# Altium PCB MasterBoard (SurfaceMount).PcbDoc (part 3 of 3)
Units mil, origin at the board's own origin, x right, y up, seen from the top; angles counter-clockwise.
Board outline 2893 x 3176 mil, 4 copper layers (Top Layer, GROUND, POWER, Bottom Layer), stack 23.756 mil thick; 101 components, 58 nets, 327 pads, 95 vias.
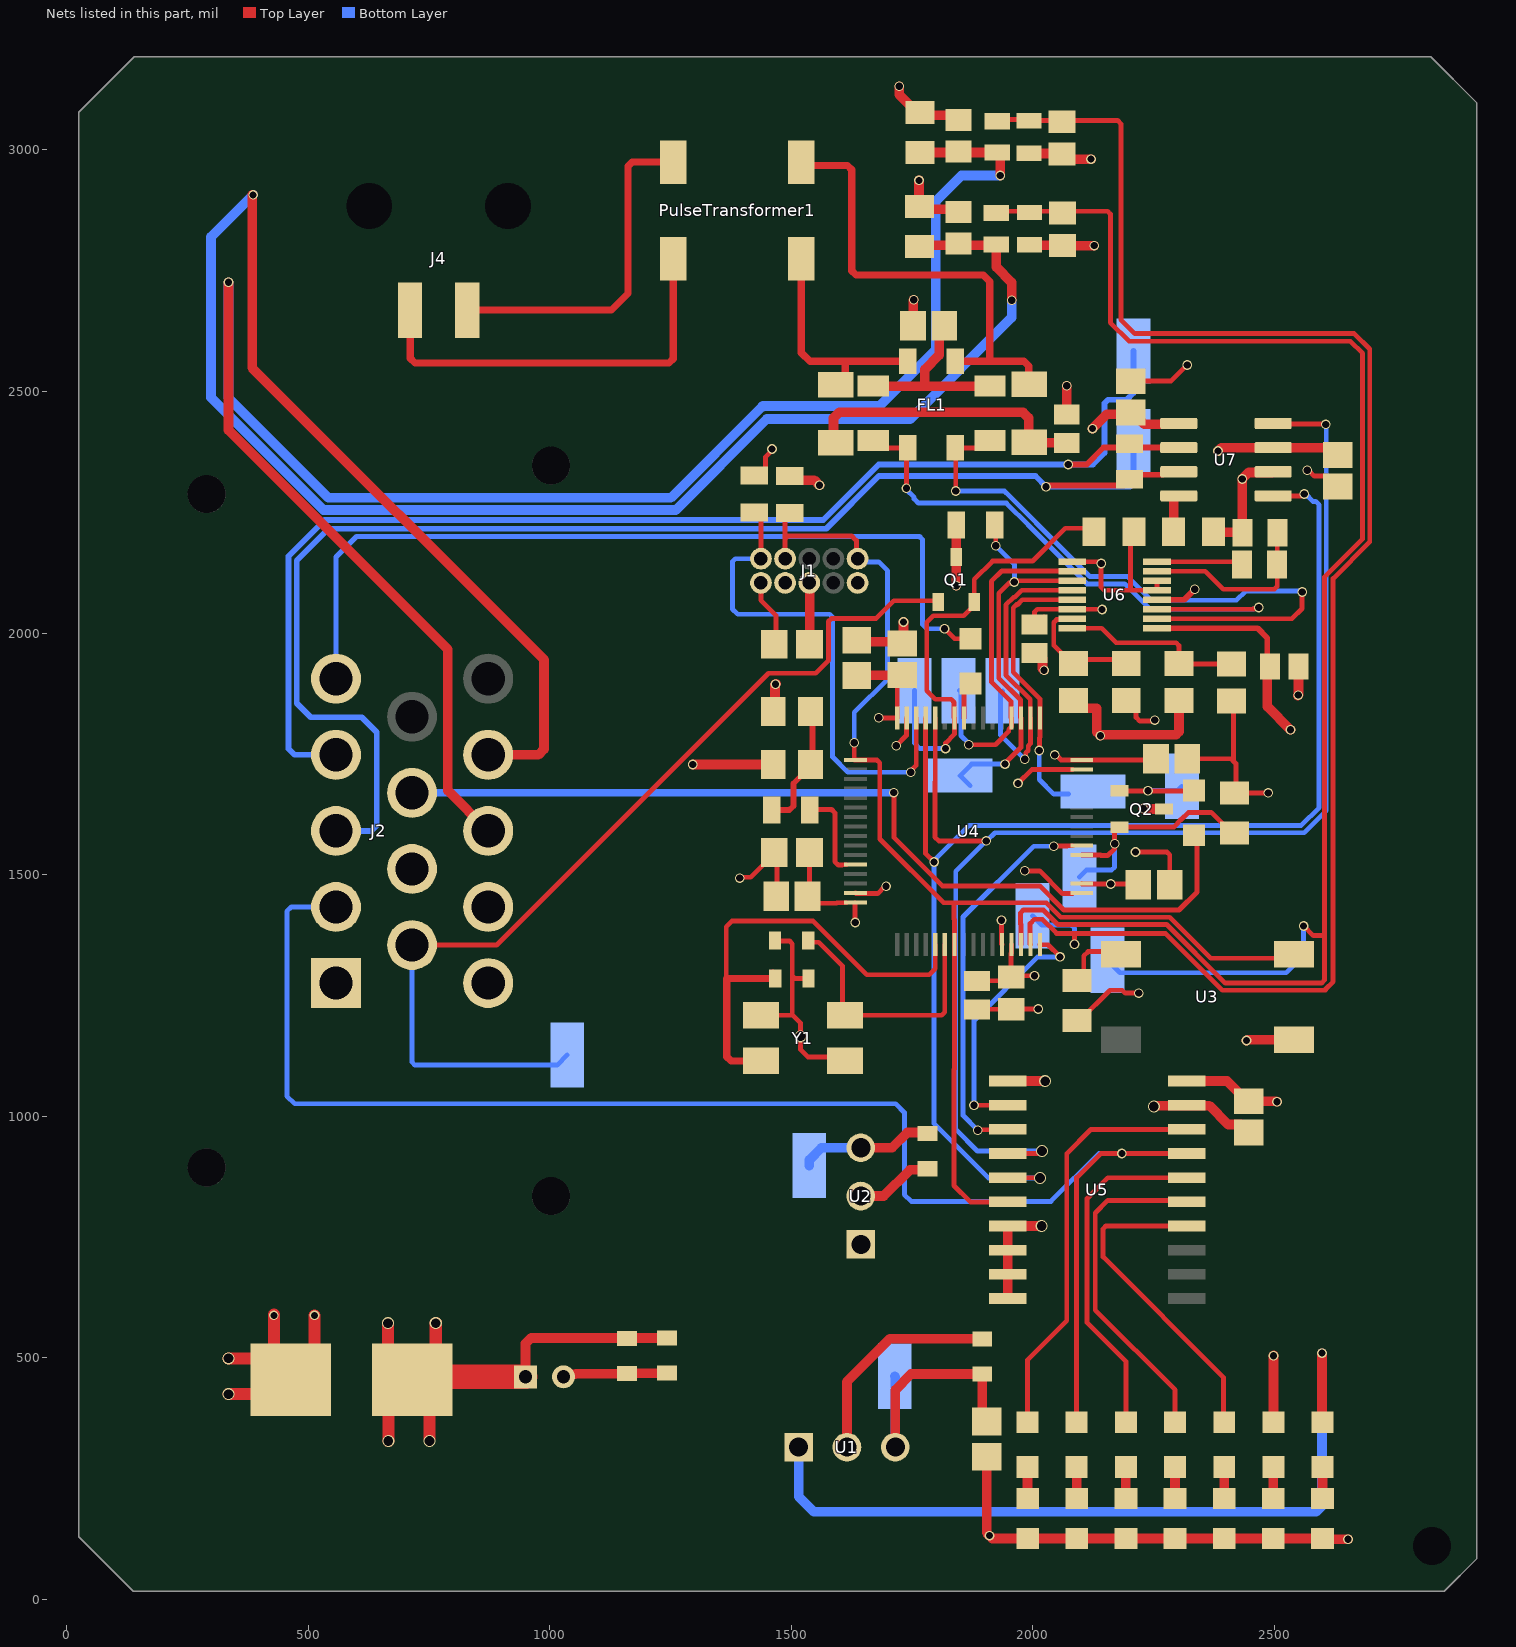
[diagram p4: the nets of this part, all layers, seen from the top]

## Part data (continued)
U6: library part CMP-0937-00011-1, "IsoSPI Isolated Communication Interface, 2.7 to 5.5 V, -40 to 85 degC, 16-Pin MSOP (MS), Pb-Free, Tape and Reel", IO Supply Current="1 uA Max.", IO Supply Voltage Range="1.7 to 5.5 V", Manufacturer="Linear Technology", Power Supply="2.7 to 5.5 V", Receiver Input Resistance="35 kOhm", Supplier Part Number 1=LTC6820IMS#TRPBFCT-ND, Supply Current, IDLE State="2 uA", Temperature Range (degC)="-40 to 85", ComponentLink1Description="Manufacturer URL", ComponentLink1URL=http://www.linear.com/, ComponentLink2Description=Datasheet, ComponentLink2URL=http://cds.linear.com/docs/en/datasheet/6820fa.pdf, ComponentLink3Description="Package Specification", ComponentLink3URL=http://cds.linear.com/docs/en/packaging/05081669_A_MS16.pdf, DatasheetVersion="Rev. A", Manufacturer Part Number=LTC6820IMS#TRPBF, Mounting Technology="Surface Mount", PackageDescription="16-Pin Micro Small Outline Package, Body 4.039 x 3 mm, Pitch 0.5 mm", PackageReference=MS-16, PackageVersion="Rev. A", Packing="Tape and Reel", PartNumber=LTC6820IMS#TRPBF, Supplier 1=Digi-Key, Supplier 2=Mouser, Supplier Part Number 2=584-LTC6820IMS#TRPBF, VBIAS="1.9 to 2.1 V"
U7: "IC CAN TRANSEIVER HS 8SOIC", Case/Package=SOIC, Manufacturer 1="NXP Semiconductors", Manufacturer Part Number 1=TJF1051T/1J, Max Operating Temperature=125°C, Max Supply Voltage=5.5V, Min Operating Temperature=-40°C, Min Supply Voltage=4.5V, Supplier Part Number 1=61AC2368, Category="Interface ICs", ComponentLink1Description=Datasheet, ComponentLink1URL=https://www.farnell.com/datasheets/2080616.pdf, ComponentLink2Description="Supplier Link", ComponentLink2URL=https://www.newark.com/nxp/tjf1051t-1j/can-transceiver-5mbps-soic-8/dp/61AC2368?gclid=CjwKCAiA1eKBBhBZEiwAX3gqlxQsUZSrTqhgUbpvxTd09IiKsEelRDLU8t4m6T0nWWFbevXOORPvhRoC6uIQAvD_BwE&mckv=sitHQX2q7_dc|pcrid|492622077320|plid||kword||match||slid||product|61AC2368|pgrid|108905520170|ptaid|pla-902764019279|&CMP=KNC-GUSA-GEN-Shopping-NewStructure-Manuf-Semiconductors-ICs, ComponentLink3Description=http://www.farnell.com/datasheets/2080616.pdf?src-supplier=Farnell, ComponentLink3URL=http://www.farnell.com/datasheets/2080616.pdf?src-supplier=Farnell, ComponentLink4Description=http://www.nxp.com/documents/data_sheet/TJF1051.pdf?src-supplier=Avnet, ComponentLink4URL=http://www.nxp.com/documents/data_sheet/TJF1051.pdf?src-supplier=Avnet, Data Rate=5Mbps, Mount="Surface Mount", Number of Pins=8, Number of Transceivers=1, Packaging="Tape and Reel", Pricing 1="1=1.29000, 10=1.16000, 25=1.10000, 50=1.00000, 100=0.90400, 250=0.84500 (USD)", Receiver Hysteresis=120mV, RoHS=Yes, RoHS Compliant=Yes, Simplex/Duplex="Half Duplex", Supplier 1=Newark
Y1: library part ABM3B-48.000MHZ-B2-T, "CRYSTAL, 48MHZ, 18PF, 5 X 3.2MM; Product Range:ABM3B Series; Frequency Nom:48MHz; Frequency Stability + / -:50ppm; Frequency Tolerance + / -:20ppm; Crystal Case:SMD, 5mm x 3.2mm; Load Capacitance:18pF; Operating Temperature Min:-20 C", Case/Package=SMD/SMT, ESR (Equivalent Series Resistance)=50R, Frequency=48MHz, Frequency Stability=50ppm, Frequency Tolerance=20ppm, Load Capacitance=18pF, Manufacturer 1=Abracon, Max Operating Temperature=70°C, Min Operating Temperature=-20°C, Operating Frequency="48 MHz", Package=None, Package Quantity=1000, Resistor Type=Ceramic, Supplier Part Number 1=535-9133-1-ND, Availability=Unavailable, Category=Crystals, ComponentLink1Description=https://datasheet.ciiva.com/4945/abm3b-39910-4945264.pdf?src-supplier=Mouser, ComponentLink1URL=https://datasheet.ciiva.com/4945/abm3b-39910-4945264.pdf?src-supplier=Mouser, ComponentLink2Description=https://datasheet.ciiva.com/855/abm3b-855707.pdf?src-supplier=Digi-Key, ComponentLink2URL=https://datasheet.ciiva.com/855/abm3b-855707.pdf?src-supplier=Digi-Key, ComponentLink3Description=https://datasheet.ciiva.com/855/abm3b-855708.pdf?src-supplier=Digi-Key, ComponentLink3URL=https://datasheet.ciiva.com/855/abm3b-855708.pdf?src-supplier=Digi-Key, ComponentLink4Description=https://datasheet.ciiva.com/855/abm3b-855709.pdf?src-supplier=Digi-Key, ComponentLink4URL=https://datasheet.ciiva.com/855/abm3b-855709.pdf?src-supplier=Digi-Key, ComponentLink5Description=https://datasheet.ciiva.com/7998/abm3b-7998585.pdf?src-supplier=Element14, ComponentLink5URL=https://datasheet.ciiva.com/7998/abm3b-7998585.pdf?src-supplier=Element14, Depth=3.2mm, Height=0.043inch, Lead Free="Lead Free", Length=5mm, Manufacturer Part Number 1=ABM3B-48.000MHZ-B2-T, Mount="Surface Mount", MP=ABM3B-48.000MHZ-B2-T, Number of Pins=4, Packaging="Tape and Reel", Price=None, Pricing 1="1=0.95000, 10=0.83900, 50=0.78440, 100=0.69310, 500=0.65664 (USD)", REACH SVHC="No SVHC", RoHS=Yes, Series=ABM3B, Series Resistance=50R, Stock 1=2963, Supplier 1=Digi-Key, Termination=SMD/SMT, Tolerance=20ppm, Width=3.2mm

## Free pads (board coordinates)
  round 60 hole 78.74: 2(2826,111)

## Via types
v1: diameter 20, hole 15, Top Layer to Bottom Layer, 83 vias
v2: diameter 25, hole 20, Top Layer to Bottom Layer, 12 vias

## Nets (pads, with @x,y where several pads share a name; then routed paths per layer and width w, separated by ;. In a path a pad name is that pad's centre, name@x,y a point inside that pad or via, vN(x,y) a via of type N, cw(c..) or ccw(c..) an arc to the next point about the centre after c; other vN are vias at no path point)
12V_Fused: C1.1 C2.1 C4.1 F1.2 R7.2 U1.1 U2.1 | length 2815.8
  Top Layer w10: F1.2@665,505 F1.2@715,455 ; F1.2@666,406 F1.2@715,455 ; F1.2@751,419 F1.2@715,455 ; F1.2@764,504 721,461 F1.2@715,455
  Top Layer w20: C2.1@949.63,461 949.63,529.7 961.35,541.42 C4.1@1243,541.42 ; v1(2598,510) 2598,368.52 R7.2@2599.52,367
  Top Layer w25: F1.2@665,505 v2@665,570 ; v2(666,328) F1.2@666,406 ; v2@751,333 F1.2@751,419 ; F1.2@764,504 v2(764,572)
  Top Layer w50: F1.2@721,461 C2.1@949.63,461
  Bottom Layer w20: U1.1@1515,315.42 1515,213 1546,182 2586.28,182 2598,193.72 v1(2598,510)
  other v2: 751,328 665,572
AIR_Open_Sig: AIR_OPEN_SIGNAL.1 J2.6 Q1.1 | length 2007
  Top Layer w10: J2.6@715,1354.52 890.17,1354.52 1452.6,1916.95 1550.45,1916.95 1576.67,1943.17 1576.67,2024.14 1582.53,2030 1675,2030 1706,2061 1706,2061.14 1711.86,2067 1801.34,2067 Q1.1@1803.6,2064.74
  Bottom Layer w10: J2.6@715,1354.52 715,1111.86 720.86,1106 1015,1106 AIR_OPEN_SIGNAL.1@1036,1127
AIRS_Signal_NMOS: "AIR Signal NMOS.1" Q1.2 R16.2 U4.42 | length 953.1
  Top Layer w10: v1(1819,1761) 1819,1772.35 1837.22,1790.57 U4.42@1837.22,1824.35 1836.55,1825.02 1836.55,1857.07 1830.61,1863.01 1797.85,1863.01 1780,1880.86 1780,2022.14 1793.9,2036.04 1856.59,2036.04 1878.4,2057.85 1878.4,2111.11 1916.29,2149 1999,2149 2067,2217 2113.63,2217 R16.2@2126.63,2204
  Bottom Layer w10: 1755,1881 1755,1772 1766,1761 v1(1819,1761)
CANH: CANH.1 J2.3 R37.2 U7.7 | length 2957.8
  Top Layer w12: v1(2027,2303) 2029.16,2303 2031.46,2305.29 2186.91,2305.29 R37.2@2200,2318.39 2209.52,2327.9 2268.86,2327.9 2274.95,2334 U7.7@2301.72,2334
  Bottom Layer w12: J2.3@557.52,1590.74 630.74,1590.74 642,1602 642,1795 611,1826 505.13,1826 476.26,1854.86 476.26,2150.26 542,2216 1572,2216 1681,2325 2005,2325 v1(2027,2303) 2200.97,2303 2208,2310.03 CANH.1@2208,2396
CANL: CANL.1 J2.4 R37.1 U7.6 | length 2787.4
  Top Layer w12: v1(2073,2349) 2111,2349 2146,2384 2192.39,2384 R37.1@2200,2391.61 2207.61,2384 U7.6@2301.72,2384
  Bottom Layer w12: J2.4@557.52,1748.22 471.78,1748.22 459.26,1760.74 459.26,2159.26 534,2234 1565.96,2234 1680.96,2349 v1(2073,2349) 2124,2349 2148,2373 2148,2475.97 2155.03,2483 2194,2483 2208,2497 CANL.1@2208,2584
CanRx: U4.44 U5.4 U7.4 | length 2888.2
  Top Layer w10: U4.44@1797.85,1824.35 1797.85,1692.52 1797.1,1691.78 1797.1,1577.9 1805,1570 v1(1903,1570) ; U5.4@1948,923 2009.27,923 2014.5,928.23 v2(2018.56,928.23) ; U7.4@2497,2434 2498,2433 2605,2433 v1(2606,2432)
  Bottom Layer w10: v2(2018.56,928.23) 1884.77,928.23 1840.13,972.87 1840.13,1507.13 v1(1903,1570) 1904.36,1570 1921.36,1587 2561.21,1587 2607,1632.79 2607,2431 v1(2606,2432)
CanRx_FromBuff: R3.2 U5.16 | length 720
  Top Layer w10: R3.2@2192.16,367 2192.16,492.84 2112,573 2112,830 2155,873 U5.16@2318,873
CanTx: U4.45 U5.5 U7.1 | length 2754.6
  Top Layer w10: U4.45@1778.17,1824.35 1777.43,1823.62 1777.43,1823.24 1777.43,1544.22 v1(1795.33,1526.33) ; U5.5@1948,873 2014,873 v2(2014.5,872.5) v2@2015,872 ; U7.1@2497,2284 2554.53,2284 2558.53,2288 v1(2561.24,2288)
  Bottom Layer w10: v1(1795.33,1526.33) 1795.33,984.67 1907.5,872.5 v2(2014.5,872.5) ; v1@1797.24,1529.03 1797.24,1530.94 1802,1535.71 1802,1536 1868,1602 2555,1602 2592,1639 2592,2265.64 2584.93,2272.72 2579.23,2272.72 2563.94,2288 v1(2561.24,2288)
CanTx_FromBuff: R4.2 U5.15 | length 702.4
  Top Layer w10: R4.2@2294,367 2294,434 2129,599 2129,800 2155,826 2315,826 U5.15@2318,823
CHANNEL1: C6.1 CHANNEL1.1 R10.1 R11.2 U4.14 | length 3650.6
  Top Layer w10: R11.2@1924,2869.48 1927.52,2873 1990.5,2873 R10.1@1993,2870.5 1995.5,2873 2154.44,2873 2160.3,2867.14 2160.3,2642.7 2199,2604 2657,2604 2682,2579 2682,2195 2603,2116 2603,1374 ; U4.14@1975.02,1355.85 1975.02,1397.1 1974.27,1397.85 1974.27,1421.14 1980.13,1427 2021.57,1427 2051.54,1397.03 2276.76,1397.03 2397.95,1275.84 2597.14,1275.84 2603,1281.7 2603,1374 ; v1(2560,1394) 2580,1374 2603,1374
  Bottom Layer w10: CHANNEL1.1@2154,1323 2180,1297 2524,1297 2560,1333 v1(2560,1394)
CHANNEL2: C11.2 CHANNEL2.1 R13.1 R15.2 U4.15 | length 3447.5
  Top Layer w10: R15.2@1926,3059.48 1929.52,3063 1989.5,3063 R13.1@1992,3060.5 1992.5,3061 C11.2@2060,3061 ; U4.15@1994.7,1355.85 1994.03,1356.52 1994.03,1390.59 1993.95,1390.67 1993.95,1398.95 2003,1408 2019.36,1408 2048.76,1378.6 2086,1378.6 ; C11.2@2060,3058.46 C11.2@2060,3061 ; v1(2086,1356) 2086,1378.6 ; C11.2@2060,3061 2175.14,3061 2182,3054.14 2182,2649 2211,2620 2665,2620 2697,2588 2697,2188.79 2621,2112.79 2621,1278.49 2605.33,1262.81 2605.33,1260.84 2391.73,1260.84 2273.98,1378.6 2086,1378.6
  Bottom Layer w10: CHANNEL2.1@1999,1415 2018,1396 2079,1396 2086,1389 v1(2086,1356)
ChargeSignal: R35.1 U4.41 | length 77.8
  Top Layer w10: U4.41@1856.91,1824.35 1856.91,1880.15 1856.16,1880.9 R35.1@1871,1895.74
Charging: "Charging Signal.1" Q2.1 R33.1 | length 228.3
  Top Layer w10: Q2.1@2178.74,1673.4 2332.14,1673.4 R33.1@2333,1674.26
  Bottom Layer w10: v1(2238,1674) 2299,1674 2308,1683
CS_CHANNEL1: C7.2 J2.13 R9.1 R11.1 | length 4216.6
  Top Layer w20: v1@384,2907 384,2549 988,1945 988,1759.94 976.28,1748.22 J2.13@872.48,1748.22 ; R9.1@1765,2800.63 1766.95,2802.57 1922.05,2802.57 R11.1@1924,2804.52 1924,2757.79 1956,2725.79 v1(1956,2688.87)
  Bottom Layer w20: v1(386,2907) 299,2820 299,2487.64 531.64,2255 1261,2255 1449,2443 1746,2443 1956,2653 v1(1956,2688.87)
CS_CHANNEL2: C10.1 J2.12 R12.1 R15.1 | length 3945.8
  Top Layer w20: v1(335,2726) 335,2420 789,1966 789,1674.22 J2.12@872.48,1590.74 ; R12.1@1766,2994.63 1766.05,2994.57 1925.95,2994.57 R15.1@1926,2994.52 1932,2988.52 v1(1932,2947)
  Bottom Layer w20: v1(335,2726) 335,2487 542,2280 1250.64,2280 1438.64,2468 1439,2468 1441,2470 1682,2470 1799,2587 1799,2894 1852,2947 v1(1932,2947)
GND: C1.2 C2.2 C3.2 C4.2 C5.2 C6.2 C7.1 C8.2 C9.2 C10.2 C11.1 C12.1 C13.1 C14.1 C15.2 C16.1 C17.1 C18.2 C19.1 C20.1 C21.1 C22.1 C23.1 C24.1 C25.1 C26.1 C27.2 C28.2 D1.1 D2.1 D3.1 D4.1 D5.1 D6.1 D7.1 J1.3 J1.5 J1.9 J2.7 J2.11 R9.2 R10.2 R12.2 R13.2 R14.1 R16.1 R20.2 R23.2 R25.2 R26.1 R34.1 R36.2 U1.2 U2.2 U3.4 U4.12 U4.18 U4.31 U4.47 U4.63 U5.1 U5.7 U5.8 U5.9 U5.10 U5.19 U6.1 U6.13 U6.14 U7.2 Y1.2 Y1.4 | length 6349.1
  Top Layer w10: v1(1393,1493) 1394.91,1494.91 1415.46,1494.91 1464.53,1543.98 C15.2@1464.53,1546 1470,1540.53 1470,1456.48 C14.1@1468.52,1455 ; Y1.4@1437.39,1209.24 1502.76,1209.24 ; C28.2@1466.93,1362.93 1496.07,1362.93 1501.93,1357.07 1501.93,1290.93 ; C27.2@1535.38,1284.93 1507.93,1284.93 1501.93,1290.93 ; Y1.2@1612.86,1117 Y1.2@1610.61,1114.76 1602.37,1123 1534,1123 1519,1138 v2(1519,1165.5) 1519,1193 1502.76,1209.24 ; U4.63@1632.5,1462.15 1633.17,1461.48 1669.62,1461.48 1670.06,1461.05 1678.34,1461.05 1693.29,1476 v1(1696,1476) ; v1(1717,1767) 1738.13,1788.13 1738.13,1823.69 U4.47@1738.8,1824.35 ; C16.1@1884,1221.47 1954.94,1221.47 C17.1@1955,1221.54 1955.46,1222 v1(2011,1222) ; v1(1934.9,1405.9) 1934.9,1380.9 1934.98,1380.82 1934.98,1356.52 U4.12@1935.65,1355.85 ; v1(1969,1689) 1998.06,1718.06 U4.31@2082.38,1718.06 ; v1(1983,1508) 2014,1508 2060.95,1461.05 2070.95,1461.05 2071.39,1461.48 U4.18@2082.38,1461.48 ; U6.1@2081.4,2147.9 2134.4,2147.9 2138.29,2144 v1(2141,2144) 2141,2095 2147.16,2088.84 2201.88,2088.84 ; R23.2@2193,1860.57 2213.28,1840.29 2213.28,1825.72 2220.91,1818.09 2250.09,1818.09 v1(2252,1820) ; C24.1@2202,2521.48 2285.48,2521.48 v1(2319,2555) ; R16.1@2209.37,2210 2201.88,2202.51 2201.88,2088.84 ; v1(2212,1547) 2277.1,1547 2282.96,1541.14 C12.1@2282.96,1479 ; U6.14@2256.6,2108.53 U6.13@2256.6,2088.84 2201.88,2088.84 ; C13.1@2324.48,1745 C13.1@2319.48,1740 2410,1740 2415,1735 ; R25.2@2411,1859.57 2415,1855.57 2415,1735 ; v1@2487,1669 v1(2486.63,1669.37) R34.1@2417,1669.37 2420,1672.37 2420,1730 2415,1735 ; v1(2567.71,2337) 2570.41,2337 2582.32,2325.09 2609.43,2325.09 C23.1@2631,2303.52 ; 1501.93,1290.93 1501.93,1210.07 1502.76,1209.24
  Top Layer w20: C2.2@1028.37,461 1033.64,466.27 1052.56,466.27 1053.87,467.58 C1.2@1160,467.58 1160.5,468.08 1242.5,468.08 C4.2@1243,468.58 ; v1(1296,1728) R20.2@1462.57,1728 R20.2@1466.57,1728 ; R14.1@1502.37,2330.76 R14.1@1497,2325.39 1505.7,2316.68 1547.32,2316.68 v1(1558,2306) ; J1.5@1537,2104 1538,2103 1538,1978 C8.2@1539,1977 ; U1.2@1615,315.42 1615,451 1703.42,539.42 C3.2@1895,539.42 ; C18.2@1635,1985.47 1638.49,1981.97 1715.45,1981.97 1720.48,1987 C19.1@1729,1978.48 ; U2.2@1643.58,835 1691,835 1745.37,889.37 1779.79,889.37 C5.2@1782,891.58 ; v1(1723,3132) 1723,3114.43 1746.31,3091.12 1784.12,3091.12 1770.37,3077.37 R12.2@1766,3077.37 ; C19.1@1729,1987 1732,1990 v1(1732,2023) ; C26.1@1751.52,2636 1752,2636.48 1752,2689 v1(1753,2690) ; v1(1764,2937) 1764,2884.37 R9.2@1765,2883.37 ; R9.2@1771.89,2890.27 1784.69,2877.47 1840.1,2877.47 C7.1@1846,2871.57 ; R12.2@1784.69,3090.47 1784.69,3073.03 1785.69,3072.03 1835.54,3072.03 C10.2@1846,3061.57 ; C9.2@1904,295.55 1904,138.12 1915.72,126.4 D1.1@1989,126.4 D2.1@2090.67,126.4 D3.1@2192.33,126.4 D4.1@2294,126.4 D5.1@2395.67,126.4 D6.1@2497.33,126.4 D7.1@2599,126.4 2600.4,125 v1(2652,125) ; U5.10@1948,623 U5.9@1948,673 U5.8@1948,723 U5.7@1948,773 v2(2018,773) ; U5.1@1948,1073 U5.1@1948,1073 2025.19,1072.96 v2(2025.22,1072.92) ; R13.2@1992,2993.5 1992.98,2992.52 C11.1@2059.02,2992.52 ; R10.2@1993,2803.5 1993.48,2803.02 2060.52,2803.02 2061.54,2802 v1(2127,2802) ; C22.1@2003,1958.47 2008.91,1958.47 2019.57,1947.8 2019.57,1926.43 v1(2023,1923) ; C11.1@2060,2991.54 C11.1@2059.02,2992.52 ; C25.1@2070,2452.53 v1(2070,2512) ; v1(2120,2981) 2070.54,2981 C11.1@2059.02,2992.52 ; v2(2250,1020.5) 2251.35,1020.5 2252.85,1022 U5.19@2318,1022 ; U5.19@2318,1023 2319,1022 2365,1022 2403.98,983.02 2430.5,983.02 C20.1@2447,966.52 ; R36.2@2373.7,2210 2374.7,2209 2432.58,2209 R26.1@2433,2208.58 ; R26.1@2433.58,2208 R26.1@2433,2208.58 ; v1(2442,1157) 2443.42,1158.42 U3.4@2540.13,1158.42 U3.4@2557,1141.55 ; U7.2@2497,2334 2495.39,2332.39 2446.39,2332.39 v1(2433,2319) R26.1@2433,2208.58 ; v1@2548,1871 v1(2548.76,1871.76) 2549.53,1872.53 C21.1@2549.53,1931
  other v1: 1909.86,132.26
HEARTBEAT: R1.2 U5.18 | length 858.5
  Top Layer w10: R1.2@1988.48,367 1988.48,495.48 2070,577 2070,923 2120,973 U5.18@2318,973
HEARTBEAT_BUFF: U4.16 U5.2 | length 532.8
  Top Layer w10: v1@1876.77,1024.23 v1(1878,1023) U5.2@1948,1023 U5.2@1948.23,1023.23 ; U4.16@2014.39,1355.85 2014.39,1355 2031,1355 v1(2056,1330)
  Bottom Layer w10: v1(1878,1023) 1878,1198.35 2009.13,1329.48 2055.48,1329.48 v1(2056,1330)
IM: FL1.2 R31.1 U6.10 | length 1330.6
  Top Layer w10: v1(1840,2294) 1840,2382.65 FL1.2@1839.21,2383.43 1895.54,2383.43 R31.1@1911,2398.9 ; U6.10@2256.6,2029.79 2535.79,2029.79 2557,2051 v1(2557,2085)
  Bottom Layer w10: v1(1840,2294) 1941,2294 1951,2284 1951.21,2284 2006,2229.21 2006,2229 2118,2117 2196.21,2117 2245.09,2068.13 2344.1,2068.13 2344.23,2068 2421,2068 2440,2087 2547.93,2087 2548.02,2086.91 2555.09,2086.91 v1(2557,2085)
IM_Out_Connector: J4.2 PulseTransformer1.3 | length 707.5
  Top Layer w15: J4.2@829.06,2668.65 1127.65,2668.65 1162,2703 1162,2966.21 1170.79,2975 PulseTransformer1.3@1255.5,2975
IP: FL1.1 R29.2 U6.11 | length 1212
  Top Layer w10: R29.2@1669.54,2398.9 1685.01,2383.43 FL1.1@1740.79,2383.43 1738,2380.65 v1(1738,2300) ; U6.11@2256.6,2049.47 2456.4,2049.47 2458.02,2051.09 2465.09,2051.09 v1(2467,2053)
  Bottom Layer w10: v1(1738,2300) 1738,2297.29 1754.06,2281.24 1754.06,2277.94 1763,2269 1945,2269 1991,2223 1991,2222.79 2111.79,2102 2190,2102 2242.53,2049.47 2456.4,2049.47 2458.02,2051.09 2465.09,2051.09 v1(2467,2053)
IP_Out_Connector: J4.1 PulseTransformer1.4 | length 859.2
  Top Layer w15: J4.1@710.94,2668.65 710.94,2569.06 721,2559 1246.71,2559 1255.5,2567.79 PulseTransformer1.4@1255.5,2775
MISO: R27.1 TP_MISO.1 U4.35 U6.3 | length 816.3
  Top Layer w10: R27.1@1920.37,2224 1923,2221.37 v1(1923,2181) ; v1(1942,1729) 1942,1730.35 1975.02,1763.36 U4.35@1975.02,1824.35 1974.35,1825.02 1974.35,1861.65 1929,1907 1929,2082.64 1950.44,2104.08 1959.51,2104.08 v1(1961.42,2106) ; v1@1961.51,2107.91 1966.04,2107.91 1966.66,2108.53 U6.3@2081.4,2108.53
  Bottom Layer w10: TP_MISO.1@1870,1684 TP_MISO.1@1849,1705 1873,1729 v1(1942,1729) ; v1(1923,2181) 1961.42,2142.58 v1(1961.42,2106)
NetC25_2: C25.2 R30.1 R32.2 | length 596.5
  Top Layer w20: R30.1@1592,2393.92 1587,2398.92 1587,2445.28 1598.72,2457 1979.28,2457 1991,2445.28 1991,2395.92 R32.2@1992,2394.92 1992.72,2394.2 2069.28,2394.2 C25.2@2070,2393.47
NetC26_2: C26.2 R29.1 R31.2 | length 383.1
  Top Layer w20: R29.1@1669.54,2511.1 1776.1,2511.1 ; C26.2@1816.48,2636 1805.91,2625.43 1805.91,2575.49 1776.1,2545.69 1776.1,2511.1 ; R31.2@1911,2511.1 1776.1,2511.1
"NetCharging Signal NMOS_1": "Charging Signal NMOS.1" Q2.2 R34.2 U4.22 | length 524
  Top Layer w10: U4.22@2101,1540.89 2139.82,1540.89 2140.92,1539.79 2154.79,1539.79 2169,1554 v1(2169,1564) 2169,1592.74 2174.86,1598.6 2291.49,1598.6 2300.36,1607.47 2300.36,1608.52 2306.22,1614.38 2307.27,1614.38 2321.89,1629 2368.69,1629 2411.06,1586.63 R34.2@2417,1586.63
  Bottom Layer w10: 2096,1495 2111,1510 2163.14,1510 2169,1515.86 v1(2169,1564)
NetD1_2: D1.2 R1.1 | length 65.6
  Top Layer w20: R1.1@1988.48,274.48 1988.74,274.22 1988.74,209.34 D1.2@1989,209.08
NetD2_2: D2.2 R2.1 | length 65.5
  Top Layer w20: R2.1@2090.32,274.48 2090.49,274.31 2090.49,209.25 D2.2@2090.67,209.08
NetD3_2: D3.2 R3.1 | length 65.5
  Top Layer w20: R3.1@2192.16,274.48 2192.25,274.39 2192.25,209.16 D3.2@2192.33,209.08
NetD4_2: D4.2 R4.1 | length 65.4
  Top Layer w20: D4.2@2294,209.08 R4.1@2294,274.48
NetD5_2: D5.2 R5.1 | length 65.5
  Top Layer w20: D5.2@2395.67,209.08 2395.75,209.16 2395.75,274.39 R5.1@2395.84,274.48
NetD6_2: D6.2 R6.1 | length 65.5
  Top Layer w20: D6.2@2497.33,209.08 2497.51,209.25 2497.51,274.31 R6.1@2497.68,274.48
NetD7_2: D7.2 R7.1 | length 65.6
  Top Layer w20: D7.2@2599,209.08 2599.26,209.34 2599.26,274.22 R7.1@2599.52,274.48
NetF1_1: F1.1 J2.1 | length 625.9
  Top Layer w10: F1.1@513,503.79 F1.1@464.21,455 ; F1.1@464.21,455 441,455 399,413 422.21,413 F1.1@464.21,455
  Top Layer w25: v2(335,425) 393.25,425 399,419.25 F1.1@399,413 ; v2(335,499) F1.1@420.21,499 ; v1@429,590 429,490.21 F1.1@464.21,455 ; F1.1@513,503.79 v1(513,588)
  other v1: 429,588
NetFL1_3: FL1.3 PulseTransformer1.2 R32.1 | length 974.1
  Top Layer w10: R32.1@1991,2516.08 R32.1@1992,2515.08
  Top Layer w15: PulseTransformer1.2@1520.5,2975 1527.5,2968 1616.21,2968 1625,2959.21 1625,2749.79 1633.79,2741 1897,2741 1910.32,2727.68 1910.32,2562.57 ; FL1.3@1839.21,2562.57 1910.32,2562.57 ; R32.1@1991,2516.08 1991,2553 1981.43,2562.57 1910.32,2562.57
NetFL1_4: FL1.4 PulseTransformer1.1 R30.2 | length 478.9
  Top Layer w10: R30.2@1592,2514.08 R30.2@1594.92,2517
  Top Layer w15: PulseTransformer1.1@1520.5,2775 1520.5,2580.5 1538.43,2562.57 1611.49,2562.57 ; R30.2@1594.92,2517 1595.21,2517 1611.49,2533.28 1611.49,2562.57 ; FL1.4@1740.79,2562.57 1611.49,2562.57
NetJ2_5: J2.5 R35.2 | length 1779.4
  Top Layer w10: v1(1817,2009) 1837.74,1988.26 R35.2@1871,1988.26 R35.2@1875,1992.26
  Bottom Layer w10: J2.5@557.52,1905.7 557.52,2157.52 600,2200 1765.14,2200 1771,2194.14 1771,2018 1780,2009 v1(1817,2009)
NetJ2_8: J2.8 R33.2 | length 1914.9
  Top Layer w10: v1(1712,1670) 1712,1577.3 1812.35,1476.95 2014.05,1476.95 2063.97,1427.03 2302.22,1427.03 2339.36,1464.17 2339.36,1575.38 R33.2@2333,1581.74
  Bottom Layer w15: J2.8@715,1669.48 v1@1712,1669.48
NetR17_1: R17.1 U3.1 | length 139.3
  Top Layer w10: R17.1@2091,1281.37 2105,1295.37 2105,1332 2114,1341 2176.45,1341 U3.1@2181.87,1335.58
NetR18_1: R18.1 U4.60 | length 182.8
  Top Layer w10: R18.1@1538.37,1634 1539.37,1635 1582.97,1635 1590,1627.97 1590,1527.13 1597.03,1520.1 1605.31,1520.1 1605.75,1520.54 U4.60@1613.87,1520.54
NetR18_2: R18.2 R19.1 R20.1 | length 260.1
  Top Layer w12: R18.2@1459.63,1634 1495.74,1634 1504.23,1642.49 1504.23,1688.82 R20.1@1543.41,1728 ; R19.1@1543,1838 1543.43,1837.57 R20.1@1543.43,1728
NetR21_1: R21.1 R26.2 U6.15 | length 378.2
  Top Layer w10: U6.15@2256.6,2128.21 2356.39,2128.21 2393.6,2091 2499.56,2091 2505.42,2096.86 2505.42,2207 R26.2@2506.42,2208
NetR21_2: R21.2 U6.16 | length 178.4
  Top Layer w10: U6.16@2256.6,2147.9 2426.69,2147.9 R21.2@2432.58,2142
NetR22_1: R22.1 R23.1 U6.7 | length 261.4
  Top Layer w10: U6.7@2081.4,2029.79 2079.51,2027.9 2048.72,2027.9 2042.86,2022.04 2042.86,1974.59 2080.02,1937.43 R22.1@2084,1937.43 2092,1945.43 2185,1945.43 R23.1@2193,1937.43
NetR24_1: R24.1 R25.1 U6.8 | length 381.6
  Top Layer w10: U6.8@2081.4,2010.1 2141.9,2010.1 2172,1980 2296.14,1980 2302,1974.14 R24.1@2302,1937.43 2303,1936.43 R25.1@2411,1936.43
NetR36_1: R36.1 U7.8 | length 83.8
  Top Layer w20: R36.1@2290.96,2210 2290.96,2282.39 2292.57,2284 U7.8@2301.72,2284
NetTP_CS_1: TP_CS.1 U4.33 U6.5 | length 581.5
  Top Layer w10: v1(2013,1757) 2013.32,1757.32 2013.32,1783.48 2014.39,1784.54 2014.39,1864.04 1959,1919.43 1959,2052.14 1966.07,2059.21 1968.13,2059.21 1978.08,2069.16 U6.5@2081.4,2069.16
  Bottom Layer w10: v1(2013,1757) 2013,1697.04 2043.04,1667 TP_CS.1@2074,1667
NetTP_MOSI_1: TP_MOSI.1 U4.36 U6.2 | length 720.7
  Top Layer w10: v1(1867,1769) 1922.39,1769 1949.98,1796.59 1949.98,1801.05 1955.33,1806.4 U4.36@1955.33,1824.35 1954.66,1825.02 1954.66,1858.34 1914,1899 1914,2106.99 1935.88,2128.87 2080.74,2128.87 U6.2@2081.4,2128.21
  Bottom Layer w10: TP_MOSI.1@1848,1881 1851,1878 1851,1787.71 1867,1771.71 v1(1867,1769)
NetTP_SCK_1: TP_SCK.1 U4.34 U6.4 | length 659
  Top Layer w10: v1@1982,1739 1984.91,1741.91 1984.91,1752.05 1990.02,1757.15 1990.02,1766.36 1994.7,1771.05 U4.34@1994.7,1824.35 1994.24,1824.82 1994.24,1862.98 1944,1913.21 1944,2058.36 1959.86,2074.21 1961.92,2074.21 1976.55,2088.84 U6.4@2081.4,2088.84
  Bottom Layer w10: TP_SCK.1@1937,1880 1933,1876 1933,1789 v1(1983,1739)
OSC_IN: C27.1 U4.5 Y1.1 | length 1038.7
  Top Layer w10: 1369,1285.21 1365,1289.21 1365,1392 1377,1404 1545,1404 1656,1293 1785,1293 1797.85,1305.85 U4.5@1797.85,1355.85
  Top Layer w15: 1369,1285.21 1409.73,1285.21 ; Y1.1@1437.39,1114.76 1374.79,1114.76 1366,1123.54 1366,1285 1409.73,1285 1466.41,1285 C27.1@1466.48,1284.93 1466.48,1290.83 C27.1@1461.18,1296.13
OSC_OUT: C28.1 U4.6 Y1.3 | length 546.4
  Top Layer w10: C28.1@1534.83,1363.93 1538.52,1360.24 1556.76,1360.24 1606,1311 1606,1213.86 Y1.3@1610.61,1209.24 1810.93,1209.24 1817.54,1215.85 U4.6@1817.54,1355.85
RESET: J1.4 J1.10 R14.2 U3.2 U4.7 U4.49 U5.6 | length 2670.5
  Top Layer w10: J1.4@1487,2154 1487,2195.14 ; R14.2@1497,2248.61 1487,2238.61 1487,2195.14 ; v1(1630,1773) 1630,1738.41 1630.67,1737.74 U4.49@1632.5,1737.74 1632.93,1737.31 1677.14,1737.31 1683,1731.45 1683,1574 1815,1442 1836.47,1442 ; J1.10@1637,2154 1634.5,2156.5 1634.5,2191.5 1625,2201 1492.86,2201 1487,2195.14 ; U5.6@1948,823 1870,823 1836.47,856.53 1836.47,1096.84 1837.22,1097.59 1837.22,1407.53 1836.47,1408.28 1836.47,1442 ; U3.2@2540.13,1335.58 2531.55,1327 2368,1327 2282.97,1412.03 2057.76,1412.03 2027.79,1442 1836.47,1442
  Bottom Layer w10: v1(1630,1773) 1630,1836 1699,1905 1699,2129 1680.5,2147.5 1643.5,2147.5 J1.10@1637,2154
RESET_FromBuff: R5.2 U5.14 | length 679.5
  Top Layer w10: U5.14@2318,773 2150.86,773 2145,767.14 2145,709.14 2394,460.14 2394,368.84 R5.2@2395.84,367
SHUTDOWN: J2.2 R2.2 U5.17 | length 3200.7
  Top Layer w10: R2.2@2090.32,367 2090.32,873.11 2140.21,923 v1(2184,923) U5.17@2318,923
  Bottom Layer w10: J2.2@557.52,1433.26 465.26,1433.26 456,1424 456,1042 472,1026 1716,1026 1734,1008 1734,838 1748,824 2037,824 2136,923 v1(2184,923)
SHUTDOWN_BUFF: U4.23 U5.3 | length 805.2
  Top Layer w10: v1(1885.77,971.23) 1886.65,972.12 1947.12,972.12 U5.3@1948,973 ; v1(2043,1559) 2043.24,1559.24 2071,1559.24 2071.67,1559.91 U4.23@2082.38,1559.91
  Bottom Layer w10: v1(1885.77,971.23) 1855.13,1001.87 1855.13,1412.47 2001.65,1559 v1(2043,1559)
SWDIO: J1.2 R8.1 U4.46 | length 1060.3
  Top Layer w10: R8.1@1423,2249.61 R8.1@1432.65,2249.61 ; J1.2@1437,2154 R8.1@1437,2249.61 ; v1(1747,1712) 1747,1714.71 1758.48,1726.19 U4.46@1758.48,1824.35
  Bottom Layer w10: J1.2@1437,2154 1383.86,2154 1378,2148.14 1378,2050 1389,2039 1579.14,2039 1585,2033.14 1585,1744 1617,1712 v1(1747,1712)
VCC_3.3V: C5.1 C8.1 C12.2 C13.2 C14.2 C15.1 C16.2 C17.2 C18.1 C19.2 C22.2 C24.2 J1.1 Q1.3 Q2.3 R8.2 R17.2 R19.2 R27.2 U2.3 U4.13 U4.19 U4.32 U4.48 U4.64 U6.6 U7.5 VCC_3.3V.1 | length 2259.3
  Top Layer w10: R8.2@1423,2326.39 1432.84,2326.39 1446.54,2340.09 1446.54,2364.84 1460,2378.29 v1(1460,2381) ; J1.1@1437,2104 1437,2068 1468,2037 1468,1980.47 C8.1@1464.53,1977 ; C15.1@1537.47,1546 1537.47,1458.99 C14.2@1533.48,1455 1547.35,1441.13 1593.13,1441.13 1593.87,1441.87 U4.64@1613.87,1441.87 ; U4.64@1631.75,1441.8 1631.75,1401.25 v1(1632,1401) ; v1(1680.93,1825.13) 1681.7,1824.35 U4.48@1719.11,1824.35 1719.11,1902.13 1718.36,1902.88 1728.51,1913.03 C19.2@1729,1913.52 ; C16.2@1884,1280.53 1947.06,1280.53 C17.2@1957.54,1291 ; U4.13@1955.33,1355.85 1955.33,1337.9 1954.58,1337.15 1954.58,1293.95 C17.2@1957.54,1291 ; v1(2003,1291) C17.2@1957.54,1291 ; C22.2@2022.84,2033.2 2007.17,2017.53 C22.2@2003,2017.53 2003,2043.61 2008.86,2049.47 U6.6@2081.4,2049.47 2142.53,2049.47 v1(2143,2049) ; v1(2045,1748) 2047.71,1748 2057.97,1737.74 2252.26,1737.74 C13.2@2254.52,1740 ; R17.2@2091,1198.63 2096.94,1198.63 2159.31,1261 2184.8,1261 2190.8,1255 v1(2219,1255) ; U4.19@2101,1481.83 2101.67,1481.17 2135.3,1481.17 2135.73,1480.73 2216.27,1480.73 C12.2@2218,1479
  Top Layer w20: R19.2@1466.14,1838 1466.14,1893.14 v1@1468,1895 ; C18.1@1635,1912.53 1635.49,1913.03 C19.2@1728.51,1913.03 ; U2.3@1643.58,935 1708.57,935 1739.99,966.42 1780,966.42 C5.1@1782,964.42 ; C19.2@1718.36,1902.88 C19.2@1729,1913.52 ; v1(1841,2098) Q1.3@1841,2157.26 1841.32,2157.57 1841.32,2223.69 R27.2@1841.63,2224 ; v1(2123.27,2423.27) 2153.2,2453.2 2198.68,2453.2 C24.2@2202,2456.52 ; C24.2@2205.94,2456.52 2230.07,2432.39 U7.5@2301.72,2432.39 ; v1(2228,1637) 2229,1636 Q2.3@2271.26,1636
  Bottom Layer w20: VCC_3.3V.1@1537,898 1537,909.96 1562.04,935 U2.3@1643.58,935
  other v1: 2160.73,1480.73 1467.07,1894.07
VCC_5V: C3.1 C9.1 C20.2 C21.2 C23.2 J2.10 R6.2 R22.2 R24.2 U1.3 U5.20 U6.9 U6.12 U7.3 VCC_5V.1 | length 2048.2
  Top Layer w12: U6.9@2256.6,2010.1 2464.9,2010.1 2485,1990 C21.2@2485,1925.53 ; U6.12@2256.6,2069.16 2312.78,2069.16 v1(2334.62,2091)
  Top Layer w20: U1.3@1715,315.42 1715,434 1747.58,466.58 C3.1@1895,466.58 1895,377.45 C9.1@1904,368.45 ; R22.2@2084,1860.57 2099.71,1844.86 2132.1,1844.86 2132.1,1794.95 v1(2139.52,1787.52) 2142,1790 2295.98,1790 2302,1796.02 R24.2@2302,1860.57 ; U5.20@2318,1073 2401.54,1073 2443.06,1031.48 C20.2@2447,1031.48 2503.52,1031.48 v1(2505,1030) ; v1(2383,2377) 2390,2384 U7.3@2497,2384 2615.48,2384 C23.2@2631,2368.48 ; C21.2@2490.47,1931 2485,1925.53 2485,1848 v1(2533,1800) ; R6.2@2497.68,367 v1(2497.68,504.68) v1@2498,505
  Bottom Layer w20: VCC_5V.1@1714,462 1715,461 U1.3@1715,315.42
pads on no net: J1.6 J1.7 J1.8 J2. J2.9 J2.14 J4. U3.3 U4.1 U4.2 U4.3 U4.4 U4.8 U4.9 U4.10 U4.11 U4.17 U4.20 U4.21 U4.24 U4.25 U4.26 U4.27 U4.28 U4.29 U4.30 U4.37 U4.38 U4.39 U4.40 U4.43 U4.50 U4.51 U4.52 U4.53 U4.54 U4.55 U4.56 U4.57 U4.58 U4.59 U4.61 U4.62 U5.11 U5.12 U5.13

## Polygon pours and split planes (outlines as drawn)
GND on GROUND (split plane): 2897.9,3089.68 2897.9,92.32 2842.68,37.1 146.32,37.1 45.1,138.32 45.1,3069.68 148.32,3172.9 2814.68,3172.9
VCC_5V on POWER (split plane): 2897.9,3089.68 2897.9,92.32 2842.68,37.1 146.32,37.1 45.1,138.32 45.1,3069.68 148.32,3172.9 2814.68,3172.9
NetF1_1 on POWER (split plane): 664.9,1303.89 664.9,717.11 580.4,632.6 579.29,630.95 578.9,629 578.9,347.11 566.89,335.1 194.11,335.1 155.1,374.11 155.1,1299.89 209.11,1353.9 614.89,1353.9
12V_Fused on POWER (split plane): 1736.9,752.89 1736.9,639.11 1698.89,601.1 1596,601.1 1594.05,600.71 1592.4,599.6 1563.4,570.6 1562.29,568.95 1561.9,567 1561.9,279 1562.29,277.05 1563.4,275.4 1599.4,239.4 1601.05,238.29 1603,237.9 1716.89,237.9 1736.9,217.89 1736.9,97.11 1713.89,74.1 621.11,74.1 603.1,92.11 603.1,579.89 623.11,599.9 1236,599.9 1237.95,600.29 1239.6,601.4 1418.11,779.9 1709.89,779.9
VCC_3.3V on POWER (split plane): 2261.9,1968.1 2089,1968.1 2087.05,1967.71 2085.4,1966.6 2084.29,1964.95 2083.9,1963 2083.9,1678 2084.29,1676.05 2085.4,1674.4 2087.05,1673.29 2089,1672.9 2329.9,1672.9 2329.9,909.11 2313.89,893.1 1401.11,893.1 1363.1,931.11 1363.1,1213 1363.1,2394.89 1511.11,2542.9 2261.9,2542.9

## Other copper
POWER (plane layer: these items are gaps in the copper):
  lines w10: 150,372 150,1302 207,1359 617,1359 670,1306 670,715 584,629 584,345 569,330 192,330 150,372 ; 598,90 619,69 1716,69 1742,95 1742,220 1719,243 1603,243 1567,279 1567,567 1596,596 1701,596 1742,637 1742,755 1712,785 1416,785 1236,605 621,605 598,582 598,90 ; 1358,929 1399,888 2316,888 2335,907 2335,1678 2089,1678 2089,1963 2267,1963 2267,2548 1509,2548 1358,2397 1358,1213 1358,929

## Silkscreen, mask and mechanical layers (free items; w line width, h text height)
Top Overlay:
  lines w10: 1045,2577 1709,2577 1709,3169 1045,3169 1045,2578

## Text inside footprints (layer, text, board x,y; h text height)
C2: Top Overlay "+" at 833.65,430.49 h60
J1: Top Overlay "1" at 1330.98,2071.99 h50; Top Overlay "2" at 1330.98,2136.01 h50; Top Overlay "9" at 1742,2059 h50; Top Overlay "10" at 1722,2144 h50; Mechanical 13 "1" at 1330.98,2071.99 h50; Mechanical 13 "2" at 1330.98,2136.01 h50